# Altium PCB rys_PCB.PcbDoc
Units mm, origin at the board's own origin, x right, y up, seen from the top; angles counter-clockwise.
Board outline 56.3 x 64 mm, 2 copper layers (Top Layer, Bottom Layer); 70 components, 58 nets, 301 pads, 93 vias.
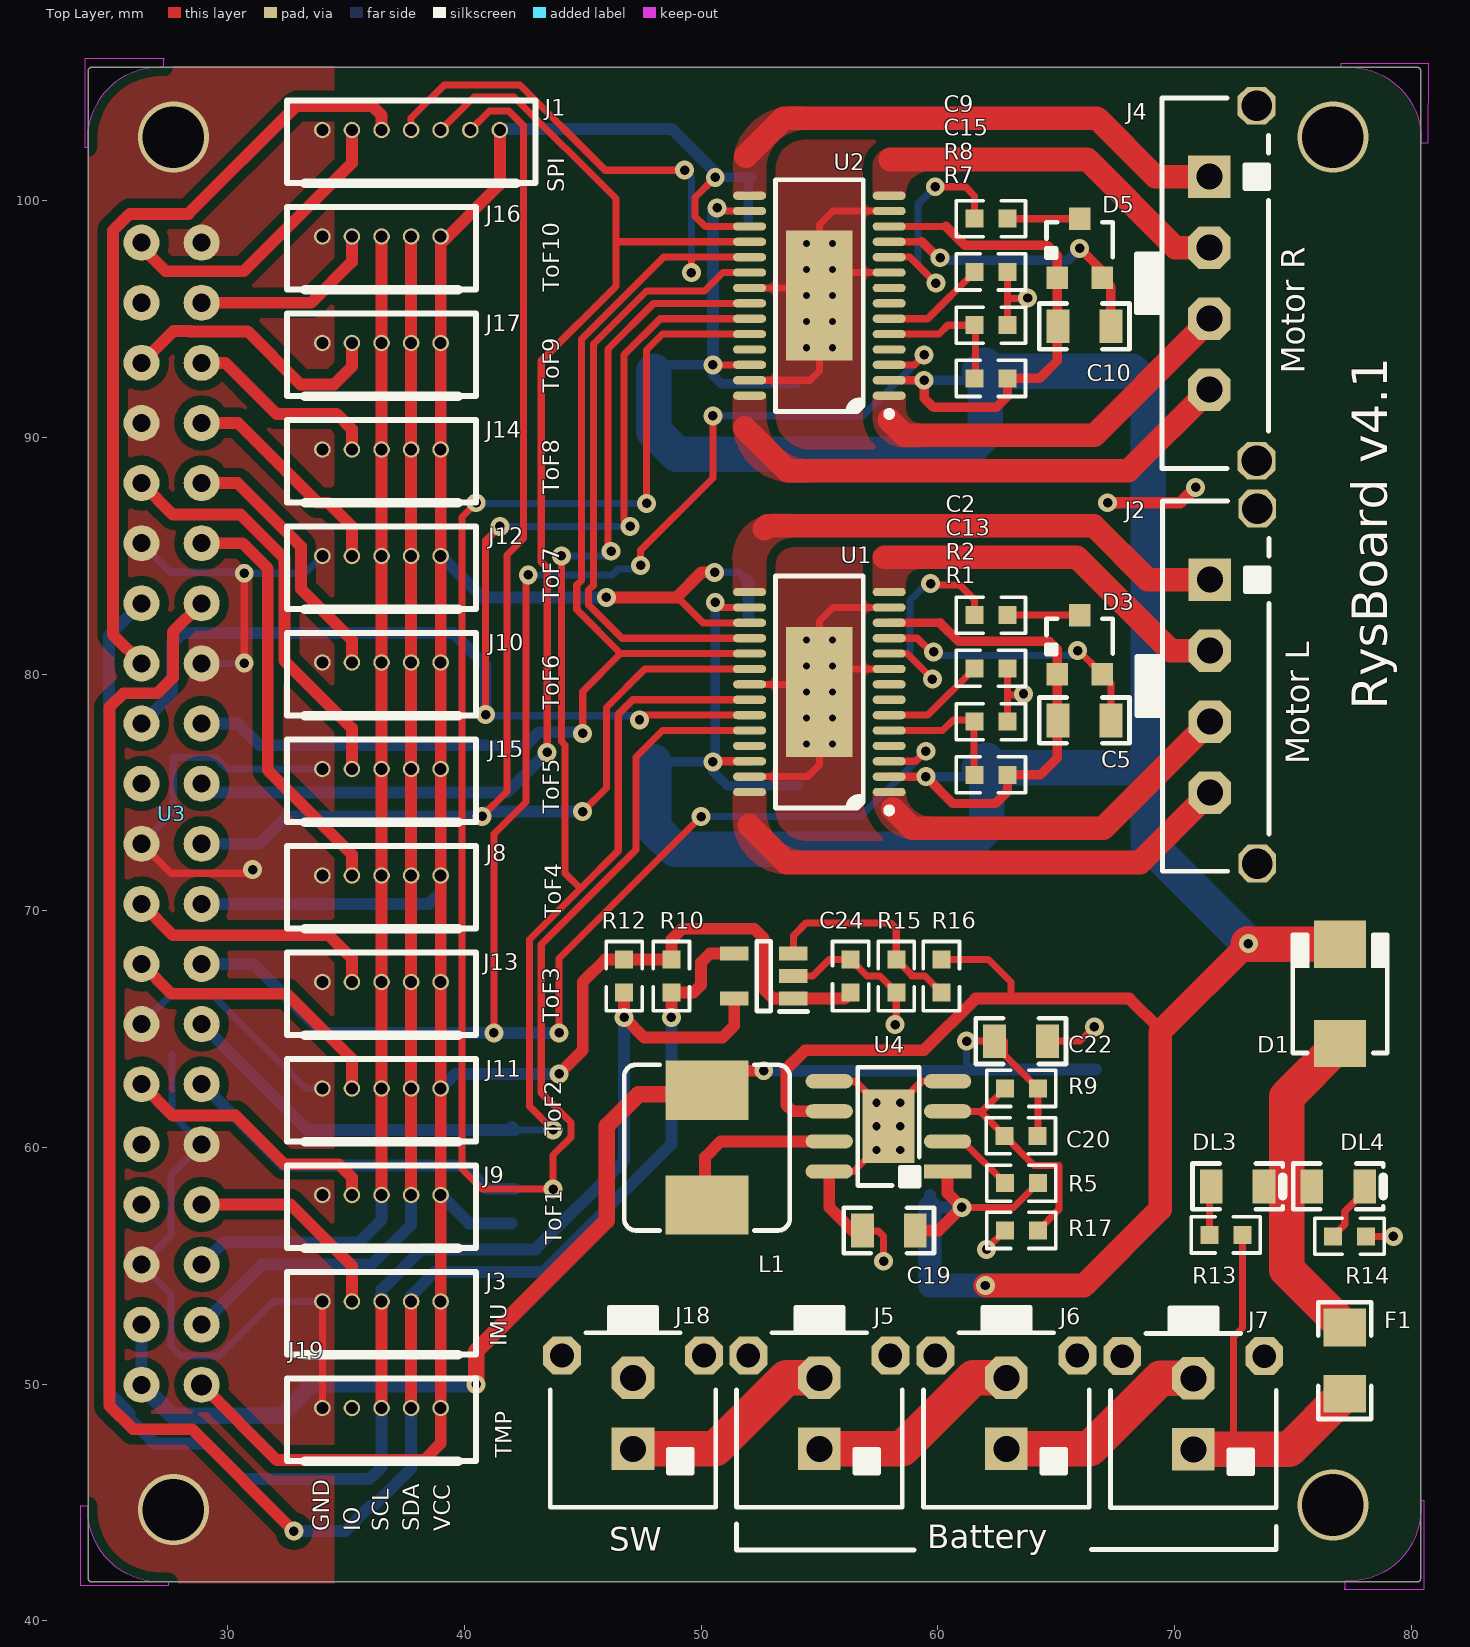
[diagram p0: Top Layer view]
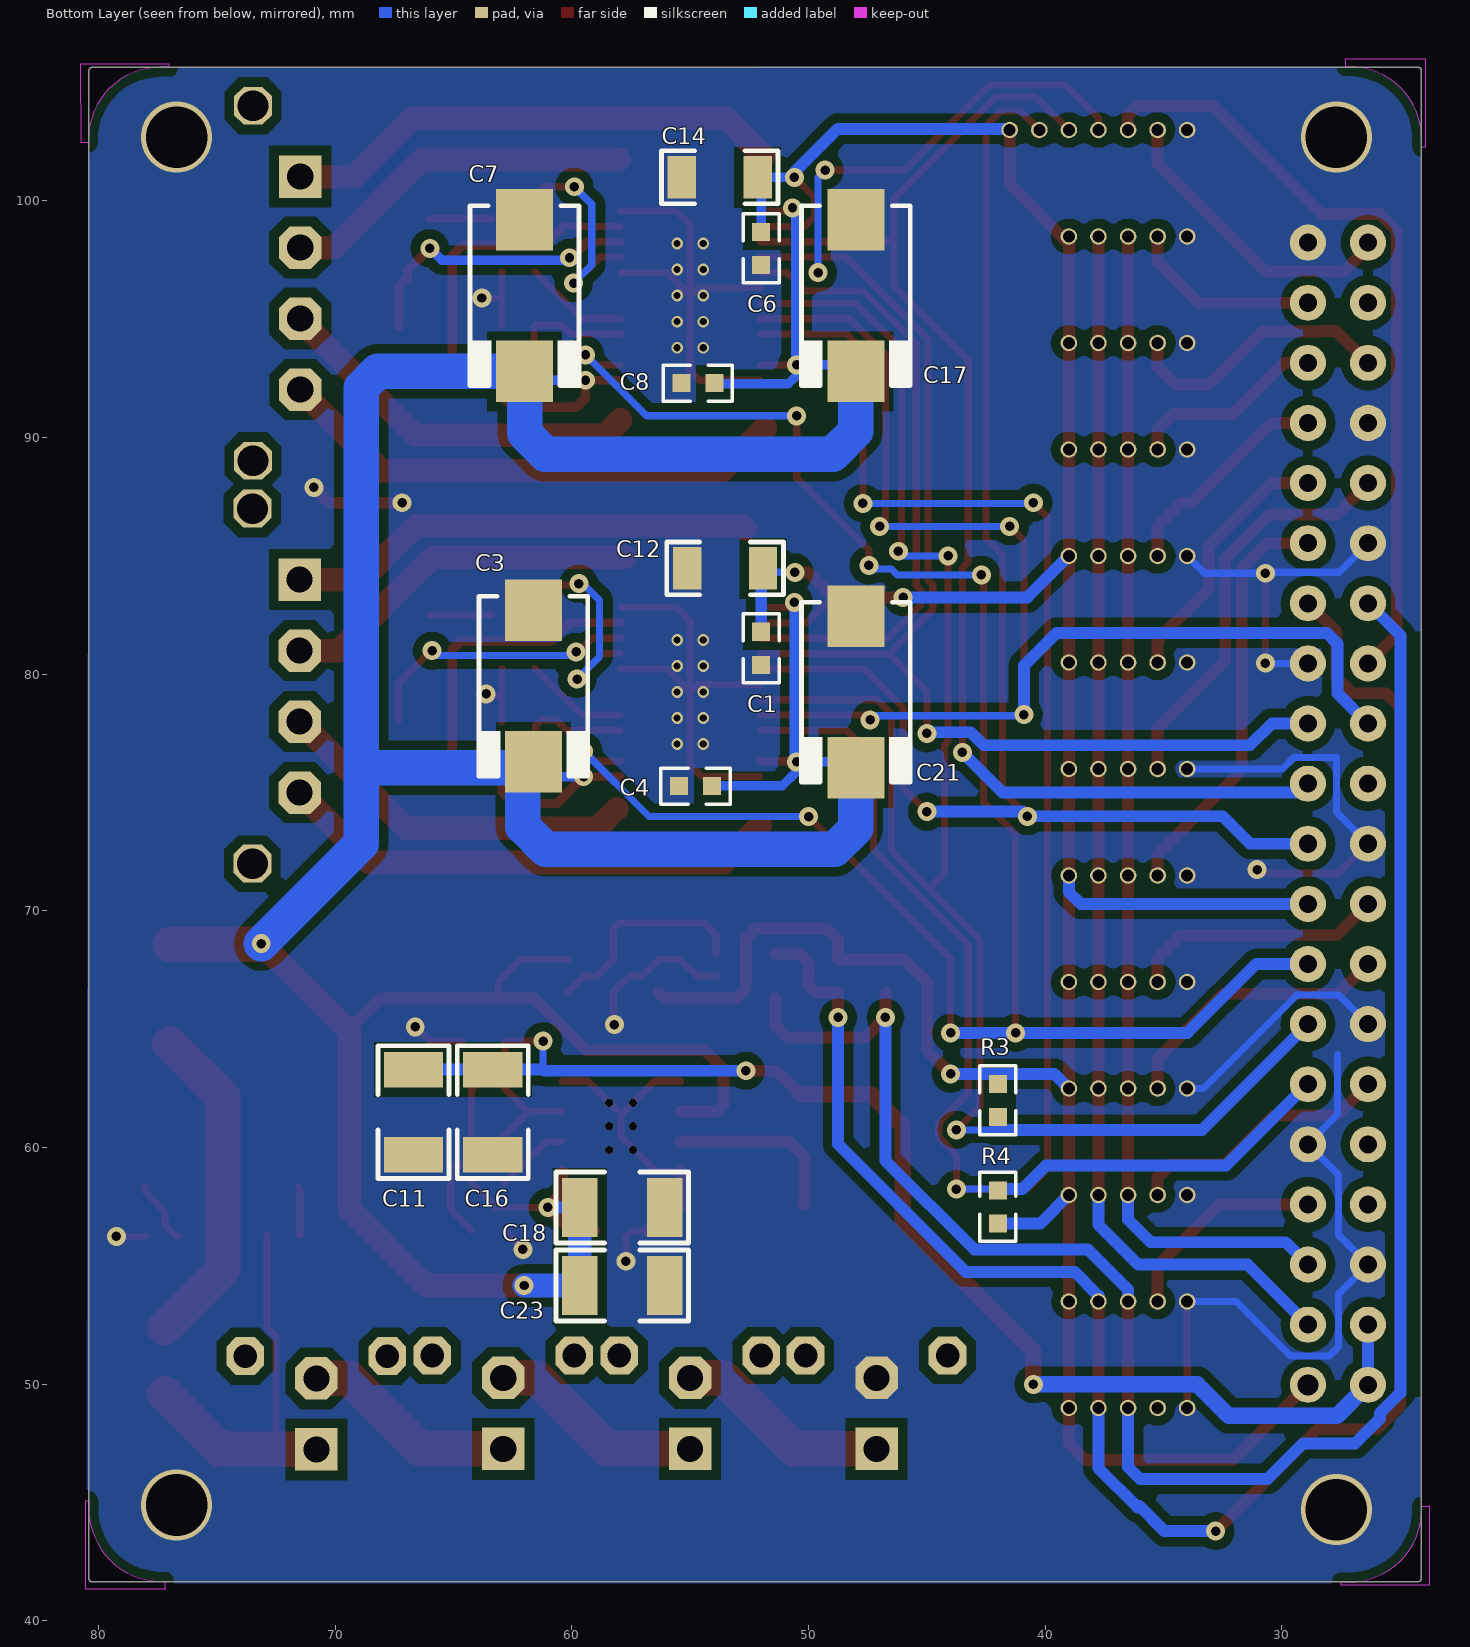
[diagram p1: Bottom Layer view, seen from below]

## Layer stack, top to bottom
Top Solder: solder mask 0.0102, Solder Resist, Dk 3.5
Top Layer: signal copper 0.0356
Dielectric 1: dielectric 0.32, FR-4, Dk 4.8
Bottom Layer: signal copper 0.0356
Bottom Solder: solder mask 0.0102, Solder Resist, Dk 3.5

## Board outline
24.257,41.65 cw(c24.257,41.8) 24.107,41.8 24.107,105.5 cw(c24.257,105.5) 24.257,105.65 80.257,105.65 cw(c80.257,105.5) 80.407,105.5 80.407,41.8 cw(c80.257,41.8) 80.228,41.652 80.229,41.652 cw(c80.2,41.8) 80.2,41.65
cut-out: 77.2,41.675 77.2,41.375 cw(c77.175,41.375) 77.175,41.35 80.55,41.35 80.55,45.075 80.4,45.075 80.4,44.7 cw(c77.375,44.7) 77.375,41.675
cut-out: 24.1,44.85 23.8,44.85 cw(c23.8,44.875) 23.775,44.875 23.775,41.5 27.5,41.5 27.5,41.65 27.125,41.65 cw(c27.125,44.675) 24.1,44.675
cut-out: 27.3,105.675 27.3,105.975 cw(c27.325,105.975) 27.325,106 23.95,106 23.95,102.275 24.1,102.275 24.1,102.65 cw(c27.125,102.65) 27.125,105.675
cut-out: 80.425,102.45 80.725,102.45 80.75,105.8 77.025,105.8 77.025,105.65 77.4,105.65 cw(c77.4,102.625) 80.425,102.625
cut-out: 80.4,105.65

## Design rules (kind name [scope] priority, off if disabled: settings)
Clearance [All] p1: gap=0.4 ignorepadtopadclearanceinfootprint=FALSE except(0.1: Arc-Text Track-Text SMDPad-Text THPad-Text Via-Text Fill-Text Poly-Text Region-Text Text-Text; 0.2: Arc-Arc Arc-Track Arc-SMDPad Arc-THPad Arc-Via Track-Track Track-SMDPad Track-THPad Track-Via SMDPad-SMDPad SMDPad-THPad SMDPad-Via THPad-THPad THPad-Via Via-Via)
ComponentClearance [All] p1: gap=0.2 collisioncheckmode=3 verticalgap=0.2 showdistances=FALSE
HoleSize [All] p1: absolutevalues=TRUE maxlimit=5 minlimit=0.025 maxpercent=80.000 minpercent=20.000
PlaneClearance [All] p1: clearance=0.8
PolygonConnect [All] p1: connectstyle=Direct reliefconductorwidth=0.254 reliefentries=4 polygonreliefangle="90 Angle" airgapwidth=0.254
RoutingCorners [All] p1: cornerstyle=45-Degree minsetback=2 maxsetback=2
RoutingVias [All] p1: holewidth=0.4 width=0.8 viastyle="Through Hole" minholewidth=0.4 minwidth=0.7 maxholewidth=1 maxwidth=5
SolderMaskExpansion [All] p1: expansion=0.5
Width [All] p1: maxlimit=2 minlimit=0.3 preferedwidth=0.5
26 further rules are at their usual default settings.

## Components (designator, comment, footprint, x,y, rotation, side; value= is the part's Value field where it differs from the comment)
C1 "100n" 0603 52,81.1 r90 bottom
C2 "10n" 0603 62.25,82.5 r180 top
C3 "47u" _C_TAN_D 61.625,79.5 r90 bottom
C4 "100n" 0603 54.775,75.275 r0 bottom
C5 "220n" 0805 66.2,78.051 r180 top
C6 "100n" 0603 52,98 r90 bottom
C7 "47u" _C_TAN_D 62,96 r90 bottom
C8 "100n" 0603 54.675,92.3 r0 bottom
C9 "10n" 0603 62.25,99.25 r180 top
C10 "220n" 0805 66.2,94.701 r180 top
C11 "10u" 1210_C 66.693,61.5 r90 bottom
C12 "10u" 1206_C 53.525,84.475 r180 bottom
C13 "100n" 0603 62.25,80.25 r0 top
C14 "10u" 1206_C 53.75,101 r180 bottom
C15 "100n" 0603 62.25,97 r0 top
C16 "10u" 1210_C 63.343,61.5 r90 bottom
C17 "47u" _C_TAN_D 48,96 r90 bottom
C18 "10u" 1210_C 57.868,57.475 r0 bottom
C19 "100n" 0805 57.936,56.5 r0 top
C20 "10n" 0603 63.518,60.5 r0 top
C21 "47u" _C_TAN_D 48,79.25 r90 bottom
C22 "100n" 0805 63.518,64.5 r180 top
C23 "10u" 1210_C 57.868,54.175 r0 bottom
C24 "100n" 0603 56.318,67.25 r270 top
D1 "SK52" SMB/DO-214AA 77,66.5 r270 top
D3 "BAV99" SOT-23 66,81.25 r0 top
D5 "BAV99" SOT-23 66,98 r0 top
DL3 "RED" 0805_LED 72.675,58.36 r180 top
DL4 "GREEN" 0805_LED 76.925,58.36 r180 top
F1 "2.5A" 1206_R 77.2,51 r270 top
IC1 "MCP3221A5T-E_OT" SOT95P280X145-5N 52.65,67.25 r180 top
J1 "PICO_BLADE_7" PicoBlade_THT_1x7_HEADER 36.5,103 r0 top
J2 "Molex Microfit" "MICROFIT 4x1 Vertical" 74,80 r90 top
J3 "PICO_BLADE_5" PicoBlade_THT_1x5_HEADER 36.5,53.5 r0 top
J4 "Molex Microfit" "MICROFIT 4x1 Vertical" 73.976,97.025 r90 top
J5 "Molex Microfit" "MICROFIT 1x2 Vertical" 55,50.275 r0 top
J6 "Molex Microfit" "MICROFIT 1x2 Vertical" 62.9,50.275 r0 top
J7 "Molex Microfit" "MICROFIT 1x2 Vertical" 70.8,50.25 r0 top
J8 "PICO_BLADE_5" PicoBlade_THT_1x5_HEADER 36.5,71.5 r0 top
J9 "PICO_BLADE_5" PicoBlade_THT_1x5_HEADER 36.5,58 r0 top
J10 "PICO_BLADE_5" PicoBlade_THT_1x5_HEADER 36.5,80.5 r0 top
J11 "PICO_BLADE_5" PicoBlade_THT_1x5_HEADER 36.5,62.5 r0 top
J12 "PICO_BLADE_5" PicoBlade_THT_1x5_HEADER 36.5,85 r0 top
J13 "PICO_BLADE_5" PicoBlade_THT_1x5_HEADER 36.5,67 r0 top
J14 "PICO_BLADE_5" PicoBlade_THT_1x5_HEADER 36.5,89.5 r0 top
J15 "PICO_BLADE_5" PicoBlade_THT_1x5_HEADER 36.5,76 r0 top
J16 "PICO_BLADE_5" PicoBlade_THT_1x5_HEADER 36.5,98.5 r0 top
J17 "PICO_BLADE_5" PicoBlade_THT_1x5_HEADER 36.5,94 r0 top
J18 "Molex Microfit" "MICROFIT 1x2 Vertical" 47.125,50.275 r0 top
J19 "PICO_BLADE_5" PicoBlade_THT_1x5_HEADER 36.5,49 r0 top
L1 "3.3uH" L_HPI0624 50.25,60 r0 top
R1 "27k1%" 0603_R 62.25,75.75 r0 top
R2 "10k1%" 0603_R 62.25,78 r180 top
R3 "10k" 0603_R 42,62 r90 bottom
R4 "10k" 0603_R 42,57.5 r270 bottom
R5 "1k" 0603_R 63.536,58.5 r0 top
R7 "27k1%" 0603_R 62.25,92.5 r0 top
R8 "10k1%" 0603_R 62.25,94.75 r180 top
R9 "11k1%" 0603_R 63.536,62.5 r0 top
R10 "4k7" 0603_R 48.75,67.25 r90 top
R12 "4k7" 0603_R 46.75,67.25 r90 top
R13 "10k" 0603_R 72.175,56.31 r0 top
R14 "10k" 0603_R 77.4,56.25 r180 top
R15 "10k1%" 0603_R 58.25,67.25 r90 top
R16 "27k1%" 0603_R 60.16,67.25 r90 top
R17 "2k1%" 0603_R 63.536,56.5 r0 top
U1 "ST L6470 28Pin" "ST HTSSOP-28" 55,79.25 r180 top locked
U2 "ST L6470 28Pin" "ST HTSSOP-28" 55,96 r180 top locked
U3 "RaspberryPi_3B+" RASPBERRYPI_S 26.36,98.24 r270 top locked
U4 "ST1S10PHR" HSOP8 57.918,60.9 r180 top

## Footprints (in the part's own frame and the unit in brackets; to place one, negate y for a bottom-side part, rotate by r counter-clockwise, add the part's x,y. Pads: shape width x height; smd on the part's side, far side on the other; paste and mask are expansions set on the pad)
0603 [mil]
  rect 30x30 smd: 1(-27.5,0) 2(27.5,0)
  silkscreen extent -58,-30 58,30, body extent -31,-16 31,16, height 31
0603_R [mil]
  rect 30x30 smd: 1(-27.5,0) 2(27.5,0)
  silkscreen extent -58,-30 58,30, body extent -31,-16 31,16, height 31
0805 [mil]
  rect 38x56 smd: 1(-44,0) 2(44,0)
  silkscreen extent -75,-38 75,38, body extent -39,-25 39,25, height 39
0805_LED [mm]
  rect 0.965x1.422 smd: A(1.118,0) K(-1.118,0)
  silkscreen extent -1.91,-0.97 1.91,0.97, body extent -1,-0.63 1,0.63, height 0.9
1206_C [mm]
  rect 1.2x1.8 smd: 1(-1.6,0) 2(1.6,0)
  silkscreen extent -2.46,-1.12 2.46,1.12, body extent -1.6,-0.8 1.6,0.8, height 0.8
1206_R [mm]
  rect 1.6x1.8 smd: 1(-1.4,0) 2(1.4,0)
  silkscreen extent -2.46,-1.12 2.46,1.12, body extent -1.6,-0.8 1.6,0.8, height 0.8
1210_C [mm]
  rect 1.5x2.5 smd: 1(-1.8,0) 2(1.8,0)
  silkscreen extent -2.8,-1.5 2.8,1.5, body extent -2.1,-1.25 2.1,1.25, height 2
_C_TAN_D [mm] "Capacitor, SM Tantalum; Body 7.3 x 4.3 mm (LxW typ)"
  rect 2.6x2.4 smd: N(3.2,0) P(-3.2,0)
  silkscreen extent -3.8,-2.3 3.8,2.3, body extent -3.65,-2.15 3.65,2.15, height 2.8
HSOP8 [mm] "H pad 8-Pin Small Outline Integrated Circuit 1.27 mm Pitch, IPC Medium Density"
  rect 2x0.6 smd: 1(-2.5,1.905)
  oval 2x0.6 smd: 2(-2.5,0.635) 3(-2.5,-0.635) 4(-2.5,-1.905) 5(2.5,-1.905) 6(2.5,-0.635) 7(2.5,0.635) 8(2.5,1.905)
  rect 2.2x3.1 smd: 9(0,0)
  silkscreen extent -1.3,-2.5 1.3,2.53, body extent -3.1,-2.5 3.1,2.5, height 1.75
L_HPI0624 [mm] "7.3mm x 7.3mm x 3.2mm"
  rect 3.5x2.5 smd: 1(0,2.425) 2(0,-2.425)
  silkscreen extent -3.5,-3.5 3.5,3.5, body extent -3.65,-3.65 3.65,3.65, height 3.2
"MICROFIT 1x2 Vertical" [mm] "Molex Vertical 3.00mm pitch Micro-Fit 3.0 Wire-to-Board Header 430450212"
  rect 1.8x1.8 hole 1.1: 1(0,-3)
  oct 1.8x1.8 hole 1.1: 2(0,0)
  oct 1.6x1.6 hole 1: MH(-3,0.94) MH(3,0.94)
  silkscreen extent -3.5,-5.47 3.5,2.98, body extent -3.57,-5.47 3.58,3.3, height 9.95
"MICROFIT 4x1 Vertical" [mm] "Molex Vertical 3.00mm pitch Micro-Fit 3.0 Wire-to-Board Header 436500429"
  rect 1.8x1.8 hole 1.1: 1(4,2.5)
  oct 1.8x1.8 hole 1.1: 2(1,2.5) 3(-2,2.5) 4(-5,2.5)
  oct 1.6x1.6 hole 1.3: MH(-8,0.5) MH(7,0.5)
  silkscreen extent -8.32,0 7.32,5.58, body extent -8.32,0.1 7.32,5.7, height 9.95
PicoBlade_THT_1x5_HEADER [mm]
  round 0.7 hole 0.51: 0(-2.5,0) 1(-1.25,0) 2(0,0) 3(1.25,0) 4(2.5,0)
  silkscreen extent -4,-2.25 4,1.25, body extent -4,-2.25 4,1.25, height 4.25
PicoBlade_THT_1x7_HEADER [mm]
  round 0.7 hole 0.51: 0(-2.5,0) 1(-1.25,0) 2(0,0) 3(1.25,0) 4(2.5,0) 5(3.75,0) 6(5,0)
  silkscreen extent -4,-2.25 6.5,1.25, body extent -3.95,-2.2 6.55,1.3, height 4.2
RASPBERRYPI_S [mil] "singleboard_computer_40PIN_header"
  round 60 hole 35: 1(1900,100)
  round 60 hole 30: 2(1900,0) 3(1800,100) 4(1800,0) 5(1700,100) 6(1700,0) 7(1600,100) 8(1600,0) 9(1500,100) 10(1500,0) 11(1400,100) 12(1400,0) 13(1300,100) 14(1300,0) 15(1200,100) 16(1200,0) 17(1100,100) 18(1100,0) 19(1000,100) 20(1000,0) 21(900,100) 22(900,0) 23(800,100) 24(800,0) 25(700,100) 26(700,0) 27(600,100) 28(600,0) 29(500,100) 30(500,0) 31(400,100) 32(400,0) 33(300,100) 34(300,0) 35(200,100) 36(200,0) 37(100,100) 38(100,0) 39(0,100) 40(0,0)
  body extent -1266,-71 2168,2322, height 93
SMB/DO-214AA [mm] "4.7x3.7mm max"
  rect 2x2.2 smd: A(2.1,0) K(-2.1,0)
  silkscreen extent -2.5,-2 2.5,2, body extent -2.83,-1.97 2.76,1.97, height 2.44
SOT95P280X145-5N [mm]
  rect 1.2x0.6 smd: 1(-1.25,0.95) 2(-1.25,0) 3(-1.25,-0.95) 4(1.25,-0.95) 5(1.25,0.95)
  silkscreen extent -1.85,-1.48 0.3,1.5, body extent -1.4,-1.48 1.4,1.48, height 1.45
SOT-23 [mm] "SOT-23; 3 Leads; Body 3.0 x 2.6 mm, inc. leads (LxW max)"
  rect 0.9x0.95 smd: 1(-0.95,-1.25) 2(0.95,-1.25) 3(0,1.25)
  silkscreen extent -1.4,-0.4 1.4,1.1, body extent -1.45,-1.25 1.45,1.25, height 1
"ST HTSSOP-28" [mm] "HTSSOP, 28-Leads, Body 9.70x4.40mm, Pitch 0.65mm, Thermal Pad 5.50x2.80mm, IPC Medium Density"
  oval 1.4x0.35 smd: 1(-2.95,4.225) 2(-2.95,3.575) 3(-2.95,2.925) 4(-2.95,2.275) 5(-2.95,1.625) 6(-2.95,0.975) 7(-2.95,0.325) 8(-2.95,-0.325) 9(-2.95,-0.975) 10(-2.95,-1.625) 11(-2.95,-2.275) 12(-2.95,-2.925) 13(-2.95,-3.575) 14(-2.95,-4.225) 15(2.95,-4.225) 16(2.95,-3.575) 17(2.95,-2.925) 18(2.95,-2.275) 19(2.95,-1.625) 20(2.95,-0.975) 21(2.95,-0.325) 22(2.95,0.325) 23(2.95,0.975) 24(2.95,1.625) 25(2.95,2.275) 26(2.95,2.925) 27(2.95,3.575) 28(2.95,4.225)
  rect 2.8x5.5 smd: 29(0,0)
  silkscreen extent -3.08,-4.9 1.85,5.12, body extent -2.25,-4.9 2.25,4.9, height 1.2

## Part data
C1 C2 C4 C5 C6 C8 C9 C10 C11 C12 C13 C14 C15 C16 C18 C19 C20 C22 C23 C24: library part C_CER, "Ceramic Capacitor"
C3 C7 C17 C21: library part C_TAN, "Tantalum Capacitor"
D1: library part SK26, "Schottky Diode 2A 60V", Supplier=TME, Symbol=SK52, URL=https://www.tme.eu/pl/details/sk52-dio/diody-schottky-smd/diotec-semiconductor/sk52/
D3 D5: "Charge pump diode", ComponentLink1Description=Supplier, ComponentLink1URL=https://www.tme.eu/pl/details/bav99-dio/diody-uniwersalne-smd/diotec-semiconductor/bav99/?gclid=CjwKCAjwuO3cBRAyEiwAzOxKsjEfIjBEMiuf1MfOOw41XfFBLf9W3FTm4SrcCEQFmDl5D7iYJBHTpRoCdegQAvD_BwE
DL3 DL4: library part LED1, "Light Emitting Diode"
F1: library part F, "Fuse", URL=https://www.tme.eu/pl/details/bsmd1206-ss2.5/bezpieczniki-smd-1206-superszybkie/eska/fuse-1206-ff-pw-2a5/
IC1: "Integrated Circuit", Manufacturer_Name=Microchip, Manufacturer_Part_Number=MCP3221A5T-E/OT, Mouser Part Number=579-MCP3221A5T-E/OT, RS Part Number=1653428, Allied_Number=70046146, Allied Price/Stock=http://www.alliedelec.com/microchip-technology-inc-mcp3221a5t-e-ot/70046146/, Datasheet Link=http://ww1.microchip.com/downloads/en/DeviceDoc/21732D.pdf, Height=1.45mm, Mouser Price/Stock=https://www.mouser.com/Search/Refine.aspx?Keyword=579-MCP3221A5T-E%2FOT, RS Price/Stock=http://uk.rs-online.com/web/p/products/1653428, URL=https://www.tme.eu/pl/details/mcp3221a2t-e_ot/przetworniki-a-d-uklady-scalone/microchip-technology/mcp3221a2t-e-ot/
J1: "1x7 header", URL=https://www.tme.eu/pl/details/mx-53047-0510/zlacza-sygnalowe-raster-125mm/molex/530470510/
J2 J4: library part "Microfit 1x4", Supplier=TME, Symbol="Molex 436500429", URL=https://www.tme.eu/pl/details/mx-43650-0429/zlacza-sygnalowe-raster-300mm/molex/43650-0429/
J3 J8 J9 J10 J11 J12 J13 J14 J15 J16 J17 J19: "1x5 header", URL=https://www.tme.eu/pl/details/mx-53047-0510/zlacza-sygnalowe-raster-125mm/molex/530470510/
J5 J6 J7 J18: library part "Microfit 2x1", Supplier=TME, Symbol="Molex 430450212"
L1: library part L_IND_HPI0624-3R3, "Inductor", Supplier=TME, Symbol=HPI0624-3R3, URL=https://www.tme.eu/pl/details/hpi0624-3r3/dlawiki-smd-mocy/ferrocore/
R1 R2 R3 R4 R5 R7 R8 R9 R10 R12 R13 R14 R15 R16 R17: library part R, "Resistor"
U1 U2: "SPI stepper driver"
U4: "DC/DC converter 3A", Supplier=TME, URL=https://www.tme.eu/pl/details/st1s14phr/regulatory-napiecia-uklady-dcdc/st-microelectronics/

## Via types
v1: diameter 0.8, hole 0.4, Top Layer to Bottom Layer, tented both sides, 62 vias
v2: diameter 0.5, hole 0.3, Top Layer to Bottom Layer, 20 vias
v3: diameter 0.35, hole 0.35, Top Layer to Bottom Layer, 6 vias
v4: diameter 3, hole 2.6, Top Layer to Bottom Layer, 4 vias
v5: diameter 0.8, hole 0.4, Top Layer to Bottom Layer, tented top, 1 vias

## Nets (pads, with @x,y where several pads share a name; then routed paths per layer and width w, separated by ;. In a path a pad name is that pad's centre, name@x,y a point inside that pad or via, vN(x,y) a via of type N, cw(c..) or ccw(c..) an arc to the next point about the centre after c; other vN are vias at no path point)
3V3: C1.2 C6.2 C12.2 C14.2 C24.2 IC1.1 J1.6 J3.4 J8.4 J9.4 J10.4 J11.4 J12.4 J13.4 J14.4 J15.4 J16.4 J17.4 J19.4 R3.2 R4.2 R10.2 R12.2 U1.17 U2.17 U3.1 U3.17 | length 145.2
  Top Layer w0.3: 48.987,83.278 49.014,83.25 50.089,82.175 U1.17 ; v1(50.6,101) 49.75,100.15 49.75,99.35 50.175,98.925 U2.17
  Top Layer w0.5: U3.1 32.08,46.8 38.3,46.8 39,47.5 J19.4 J3.4 J9.4 J11.4 J13.4 J8.4 J15.4 J10.4 J12.4 J14.4 J17.4 39,98.2 41.5,100.7 J1.6 ; v1(44,63.118) 45,64.118 45,67 45.949,67.949 R12.2 R10.2 48.75,68.793 49.207,69.25 52.25,69.25 52.65,68.85 52.65,66.7 53.05,66.3 IC1.1 56.066,66.3 C24.2 ; v1(46,83.25) 49.014,83.25 ; 48.987,83.278 50.019,84.311 v1(50.575,84.311)
  Bottom Layer w0.3: v1(50.575,84.311) 51.614,84.311 C12.2@51.9,84.025
  Bottom Layer w0.4: v1(50.6,101) C14.2@51.9,101 ; 52,99.118 52,100.9 C14.2@51.9,101 ; C14.2 C14.2@51.9,101
  Bottom Layer w0.5: U3.17 38.5,70.3 39,70.8 J8.4 ; J9.4 40.199,56.801 R4.2 ; J11.4 39.618,63.118 v1(44,63.118) ; J12.4 40.75,83.25 v1(46,83.25) ; J1.6@41.5,103.044 48.76,103.044 50.6,101.204 v1(50.6,101) ; C12.2@51.9,84.025 52,83.925 52,82.218
5V: C11.2 C16.2 C20.2 C22.2 L1.1 R9.2 U3.2 U3.4 | length 60
  Top Layer w0.3: v1(61.218,64.5) C22.2 62.819,64.5 62.819,63.915 R9.2 64.234,60.518 C20.2
  Top Layer w0.5: L1.1@50.368,62.25 51.368,63.25 v1(52.65,63.25)
  Top Layer w0.7: v1(40.5,50) 40.5,51.4 46.018,56.918 46.018,60.918 47.35,62.25 L1.1@50.368,62.25
  Bottom Layer w0.3: 61.218,63.3 v1(61.218,64.5)
  Bottom Layer w0.5: U3.2 U3.4 ; v1(52.65,63.25) 61.168,63.25 61.218,63.3 C16.2 C11.2
  Bottom Layer w0.7: U3.2 27.672,48.668 32.247,48.668 33.584,50.005 40.495,50.005 v1(40.5,50)
BUSY: R3.1 U1.22 U2.22 U3.13 | length 74.2
  Top Layer w0.3: v1(43.75,60.75) 42.75,61.75 42.75,68.793 44.9,70.943 ; v1(44.1,85) 44.1,77.161 44.25,77.011 44.25,76.389 44.25,71.593 44.9,70.943 ; v1(46.2,85.2) 46.075,85.325 46.075,93.75 48,95.675 U2.22 ; U1.22 47.114,78.925 46.5,78.311 46.5,72.543 44.9,70.943
  Bottom Layer w0.3: 42.132,60.75 v1(43.75,60.75) ; v1(44.1,85) 46,85 v1(46.2,85.2)
  Bottom Layer w0.5: U3.13 33.37,60.75 42.132,60.75 42,60.882
CE0: U1.23 U2.23 U3.24 | length 58.5
  Top Layer w0.3: v1(40.9,78.3) 40.9,85.65 v1(41.5,86.25) ; v1(47,86.25) 46.75,86.5 46.75,93.5 48.275,95.025 U2.23 ; v1(47.4,78.075) 47.6,78.275 U1.23
  Bottom Layer w0.3: v1(40.9,78.3) v1@40.9,78.25 ; v1(41.5,86.25) v1(47,86.25) ; v1(47.4,78.075) 47.225,78.25 v1@40.9,78.25 ; v1@40.9,78.25 40.875,78.275 40.85,78.25 v1@40.9,78.25
  Bottom Layer w0.5: U3.24 26.37,77.92 27.65,79.2 27.65,81.3 28.1,81.75 39.518,81.75 40.9,80.368 v1(40.9,78.3)
CE1: J1.2 U3.26 | length 33.1
  Top Layer w0.5: U3.26 25.148,81.672 25.148,98.742 25.858,99.452 28.342,99.452 32.903,104.013 36.109,104.013 36.5,103.622 J1.2
FLAG: R4.1 U1.24 U2.24 U3.11 | length 93.8
  Top Layer w0.3: v1(40.5,87.25) 39.9,86.65 39.9,59.1 40.75,58.25 v1(43.75,58.25) 43.75,59.689 44.5,60.439 44.5,61.061 43.25,62.311 43.25,68.586 47.25,72.586 47.25,76.5 48.375,77.625 U1.24 ; v1(47.7,87.225) 47.525,87.225 47.7,87.4 47.7,93.7 48.375,94.375 U2.24
  Bottom Layer w0.3: v1(40.5,87.25) 40.525,87.225 v1(47.7,87.225) ; R4.1@42.132,58.25 v1(43.75,58.25)
  Bottom Layer w0.5: U3.11 28.92,62.68 32.35,59.25 39.963,59.25 40.963,58.25 R4.1@42.132,58.25
GND: C1.1 C3.N C4.2 C6.1 C7.N C8.2 C11.1 C12.1 C13.2 C14.1 C15.2 C16.1 C17.N C18.1 C19.1 C21.N C22.1 C23.1 C24.1 IC1.2 J1.0 J3.0 J8.0 J9.0 J10.0 J11.0 J12.0 J13.0 J14.0 J15.0 J16.0 J17.0 J18.2 J19.0 R2.1 R8.1 R14.1 R15.1 R17.1 U1.9 U1.13 U1.21 U1.27 U1.29 U2.9 U2.13 U2.21 U2.27 U2.29 U3.6 U3.9 U3.14 U3.20 U3.25 U3.30 U3.34 U3.39 U4.4 U4.5 U4.8 U4.9 | length 140.9
  Top Layer w0.3: U3.20 27.607,71.593 30.893,71.593 v1(31.05,71.75) ; v1(30.7,80.477) v1(30.7,84.27) ; J19.0 J3.0 ; U1.27 54.5,75.675 55,76.175 U1.29 ; U1.21 54.675,79.575 U1.29 ; U2.27 54.608,92.425 55,92.817 U2.29 ; U2.21 54.675,96.325 U2.29 ; IC1.2 54.719,67.25 55.418,67.948 C24.1 57.016,67.25 57.562,67.25 58.25,66.562 R15.1 58.25,65.2 58.249,65.199 v1(58.2,65.199) ; U4.8 56.445,58.995 57.918,60.468 U4.9 U4.9@57.918,61.4 ; U4.5 56.513,62.805 v3(57.418,61.9) U4.9@57.918,61.4 ; C19.1@56.837,56.481 57.487,56.481 57.718,56.25 v1(57.718,55.2) ; U1.9 55.975,80.225 U1.29 ; U1.13 55.575,82.825 55,82.25 U1.29 ; U2.9 55.975,96.975 U2.29 ; U2.13 55.575,99.575 55,99 U2.29 ; U4.4 59.323,62.805 v3(58.418,61.9) U4.9@57.918,61.4 ; v1(62.068,55.7) 62.068,55.731 R17.1 ; R2.1 62.948,79.075 ; C13.2 62.948,79.075 ; R8.1 62.948,95.875 ; C15.2 62.948,95.875 ; v1(63.625,79.175) 63.576,79.126 63,79.126 ccw(c63,79.075) 62.948,79.075 ; v1(63.8,95.9) 63.775,95.875 62.948,95.875 ; C22.1 66.018,64.5 v1(66.617,65.1) ; R14.1@78.043,56.25 R14.1 v1(79.25,56.25)
  Top Layer w0.5: U4.8 55.418,57.475 56.393,56.5 C19.1 C19.1@56.837,56.481 ; v1(67.175,87.25) 70.25,87.25 v1(70.9,87.9)
  Bottom Layer w0.3: U3.14 27.596,66.456 29.356,66.456 33.311,62.5 J11.0 ; U3.20 27.7,74.18 27.7,76.5 27.708,76.492 29.479,76.492 29.971,76 J15.0 ; U3.30 27.589,84.311 30.659,84.311 v1(30.7,84.27) 33.27,84.27 J12.0 ; 27.644,63.936 27.644,61.396 U3.9 27.6,58.84 27.6,56.3 U3.6 27.6,53.82 27.6,51.6 28,51.2 29.629,51.2 31.929,53.5 J3.0 ; U3.25 30.683,80.46 v1(30.7,80.477)
  other v2: 54.45,77.05 55.55,77.05 54.45,78.15 55.55,78.15 54.45,79.25 55.55,79.25 54.45,80.35 55.55,80.35 54.45,81.45 55.55,81.45 54.45,93.8 55.55,93.8 54.45,94.9 55.55,94.9 54.45,96 55.55,96 54.45,97.1 55.55,97.1 54.45,98.2 55.55,98.2
  other v3: 57.418,59.9 58.418,59.9 57.418,60.9 58.418,60.9
  other v4: 27.7,44.7 76.7,44.9 27.7,102.7 76.7,102.7
IRQ: J1.1 U3.40 | length 13.9
  Top Layer w0.5: J1.1 35.25,101.6 30.678,97.028 27.372,97.028 26.16,98.24 U3.40 U3.40@26.4,98.24 ; U3.40@26.4,98.24 26.4,98.132 26.7,98.132 26.592,98.24 U3.40@26.4,98.24
MISO: J1.4 U2.18 U3.21 | length 55.7
  Top Layer w0.3: J1.4 40.4,104.4 42.1,104.4 46.4,100.1 46.4,98.275 ; v1(43.5,76.7) 43.5,83.439 43.5,84.5 43.25,84.75 43.25,93.25 46.4,96.4 46.4,98.275 ; U2.18 46.4,98.275
  Bottom Layer w0.5: U3.21 29.28,75 41.8,75 v1(43.5,76.7)
MOSI: J1.5 U1.20 U3.19 | length 61
  Top Layer w0.3: J1.5 41.057,103.807 41.874,103.807 42.5,103.181 42.5,85.743 41.8,85.043 41.8,75.05 v1(40.75,74) ; v1(45,74.2) 46,75.2 46,78.6 47.625,80.225 U1.20
  Bottom Layer w0.5: U3.19 31.34,72.84 32.5,74 v1(40.75,74) 40.95,74.2 v1(45,74.2)
NetC2_1: C2.1 D3.3 | length 2.6
  Top Layer w0.3: 63.368,82.5 D3.3
NetC2_2: C2.2 U1.10 | length 10
  Top Layer w0.3: U1.10 58.7,80.875 v1(59.775,79.8) ; v1(59.703,83.829) 59.75,83.782 60.918,83.782 61.55,83.15 C2.2@61.55,82.5
  Bottom Layer w0.3: v1(59.703,83.829) 59.571,83.829 59.55,83.85 58.825,83.125 58.825,80.75 v1(59.775,79.8)
NetC9_1: C9.1 D5.3 | length 2.6
  Top Layer w0.3: 63.368,99.25 D5.3
NetC9_2: C9.2 U2.10 | length 9.9
  Top Layer w0.3: U2.10 58.825,97.625 v1(59.925,96.525) ; v1(59.897,100.6) 61.168,100.6 61.551,100.217 C9.2
  Bottom Layer w0.3: v1(59.897,100.6) 59.16,99.863 59.16,97.298 59.925,96.533 v1(59.925,96.525)
NetC13_1: C13.1 U1.6 | length 4.4
  Top Layer w0.3: U1.6 59.577,78.275 C13.1
NetC15_1: C15.1 U2.6 | length 4.4
  Top Layer w0.3: U2.6 59.577,95.025 C15.1
NetC20_1: C20.1 R9.1 R17.2 U4.3 | length 10.2
  Top Layer w0.3: U4.3 61.784,61.535 ; R9.1 61.872,61.535 61.784,61.535 ; R17.2 65.118,57.384 65.118,59.25 64.069,59.25 C20.1 61.784,61.535
NetD1_A: D1.A DL3.K DL4.A F1.1 | length 13.9
  Top Layer w1.5: D1.A 74.75,62.15 74.75,54.85 F1.1
NetDL3_A: DL3.A R13.1 | length 2.1
  Top Layer w0.3: R13.1 71.476,58.279 DL3.A
NetDL4_K: DL4.K R14.2 | length 2.7
  Top Layer w0.3: R14.2@76.646,56.25 R14.2 77.2,56.75 77.2,57.3 78.043,58.143 DL4.K
NetF1_2: F1.2 J7.1 R13.2 | length 16.6
  Top Layer w0.3: 72.5,47.25 72.5,52 72.873,52.373 R13.2
  Top Layer w1.5: J7.1 72.5,47.25 74.85,47.25 F1.2
NetIC1_3: IC1.3 R15.2 R16.1 | length 9.3
  Top Layer w0.3: IC1.3 53.9,68.956 54.444,69.5 58,69.5 58.25,69.25 R15.2 58.9,67.298 58.9,67.25 59.461,67.25 R16.1
NetJ2_1: J2.1 U1.15 | length 19.8
  Top Layer w1: 52.675,86.15 52.8,86.275 66.594,86.275 68.869,84 J2.1
NetJ2_2: J2.2 U1.14 | length 15.4
  Top Layer w1: 57.75,84.952 65.877,84.952 69.829,81 J2.2
NetJ2_3: J2.3 U1.1 | length 15.6
  Top Layer w1: 58.104,74.322 58.925,73.5 67,73.5 J2.3
NetJ2_4: J2.4 U1.28 | length 21.3
  Top Layer w1: 52.038,73.612 53.6,72.05 68.55,72.05 J2.4
NetJ4_1: J4.1 U2.15 | length 21.3
  Top Layer w1: 51.9,101.9 53.5,103.5 66.725,103.5 69.2,101.025 J4.1
NetJ4_2: J4.2 U2.14 | length 15
  Top Layer w1: 58,101.75 66.325,101.75 70.05,98.025 J4.2
NetJ4_3: J4.3 U2.1 | length 15
  Top Layer w1: 57.95,90.75 58.6,90.1 66.617,90.1 J4.3@70.9,94.383
NetJ4_4: J4.4 U2.28 | length 21.8
  Top Layer w1: 51.84,90.41 53.65,88.6 68.051,88.6 J4.4
NetJ5_1: J5.1 J6.2 | length 9.1
  Top Layer w1.5: J5.1 58.503,47.275 61.503,50.275 J6.2
NetJ5_2: J5.2 J18.1 | length 9.1
  Top Layer w1.5: J18.1 50.603,47.275 53.603,50.275 J5.2
NetJ6_1: J6.1 J7.2 | length 9.1
  Top Layer w1.5: J6.1 66.428,47.275 69.403,50.25 J7.2
NetL1_2: L1.2 U4.7 | length 7.6
  Top Layer w0.5: L1.2 50.168,57.657 50.168,59.6 50.833,60.265 U4.7
NetR1_1: R1.1 R2.2 U1.5 | length 6
  Top Layer w0.3: U1.5 60.207,77.625 60.657,78.075 61.3,78.075 61.525,77.85 R1.1@61.525,75.75
NetR5_1: R5.1 U4.2 | length 3.2
  Top Layer w0.3: U4.2 61.072,60.265 R5.1
NetR7_1: R7.1 R8.2 U2.5 | length 6
  Top Layer w0.3: U2.5 60.05,94.375 60.425,94.75 R8.2 61.6,94.701 R7.1@61.6,92.5
OD\: J3.1 U3.7 | length 8.9
  Top Layer w0.5: U3.7 32.65,57.6 35.25,55 J3.1
SCL: J8.2 J9.2 J10.2 J11.2 J12.2 J13.2 J14.2 J15.2 J16.2 J17.2 U3.5 | length 49.9
  Top Layer w0.5: J9.2 J11.2 J13.2 J8.2 J15.2 J10.2 J12.2 J14.2 J17.2 J16.2
  Bottom Layer w0.5: U3.5 29.84,56 35.55,56 36.5,56.95 J9.2
SCL1: IC1.5 J3.2 J19.2 R12.1 U3.28 | length 80.8
  Top Layer w0.5: J19.2 J3.2 ; R12.1 v1(46.75,65.5) 47.6,64.65 50.9,64.65 51.4,65.15 IC1.5
  Bottom Layer w0.5: U3.28 26.35,83 24.991,81.641 24.991,49.635 25.858,48.768 25.858,48.542 26.9,47.5 29.1,47.5 30.6,46 36,46 36.5,46.5 J19.2 ; J3.2 36.5,54 38.2,55.7 43,55.7 46.75,59.45 v1(46.75,65.5)
SCLK: J1.3 U1.19 U2.19 U3.23 | length 67.8
  Top Layer w0.3: J1.3 37.75,103.5 39.15,104.9 42.35,104.9 45.95,101.3 v1@48.965,101.3 ; v1(45,77.5) 45,79.275 46.6,80.875 ; v1(49.593,96.975) 49.593,97.618 49.6,97.625 ; U1.19 46.6,80.875 ; U2.19 49.6,97.625 ; 46.6,80.875 46.6,80.882 44.75,82.732 44.75,83.768 44.95,83.968 44.95,94.157 48.418,97.625 49.6,97.625
  Bottom Layer w0.3: v1(49.302,101.3) 49.593,101.01 v1(49.593,96.975)
  Bottom Layer w0.5: U3.23 30.43,77.92 31.35,77 42.598,77 43.148,77.55 44.95,77.55 v1(45,77.5)
SDA: J8.3 J9.3 J10.3 J11.3 J12.3 J13.3 J14.3 J15.3 J16.3 J17.3 U3.3 | length 52.4
  Top Layer w0.5: J9.3 J11.3 J13.3 J8.3 J15.3 J10.3 J12.3 J14.3 J17.3 J16.3
  Bottom Layer w0.5: U3.3 31.44,55.06 36.06,55.06 37.75,56.75 J9.3
SDA1: IC1.4 J3.3 J19.3 R10.1 U3.27 | length 83.7
  Top Layer w0.5: U3.27 27.688,81.788 27.688,79.863 27.025,79.2 25.6,79.2 25.001,78.601 25.001,49.099 26,48.1 28.5,48.1 v1(32.8,43.8) ; J19.3 J3.3 ; v1(48.75,65.5) R10.1 49.676,66.552 50,66.875 50,67.832 50.368,68.2 IC1.4
  Bottom Layer w0.5: v1(32.8,43.8) 34.96,43.8 36.03,44.87 36.1,44.8 37.75,46.45 J19.3 ; J3.3 37.75,53.75 38.75,54.75 43.36,54.75 48.75,60.14 v1(48.75,65.5)
SDI: U1.18 U2.20 | length 26.3
  Top Layer w0.3: U1.18 46.664,81.525 45.25,82.939 45.25,83.56 45.45,83.76 45.45,93.95 47.7,96.2 50.152,96.2 50.927,96.975 U2.20
STBY: U1.3 U2.3 U3.15 | length 84.1
  Top Layer w0.3: v1(41.25,64.848) 41.25,73.257 42.6,74.607 v1@42.6,83.925 ; v1(44,64.848) 44,67.991 v1(50,73.991) ; v1(47.45,84.6) 47.45,85.25 50.5,88.3 v1(50.5,90.923) ; U1.3 59.057,76.325 59.482,76.75 v5(59.5,76.75) ; U2.3 59.014,93.075 59.425,93.486 v1(59.425,93.5)
  Bottom Layer w0.3: v1(42.7,84.2) 46.249,84.2 46.499,84.45 47.3,84.45 v1(47.45,84.6) ; v1(50,73.991) 56.741,73.991 v5(59.5,76.75) ; v1(50.5,90.923) 56.848,90.923 v1(59.425,93.5)
  Bottom Layer w0.5: U3.15 31.082,67.76 33.994,64.848 v1(41.25,64.848) v1(44,64.848)
TOF0: J8.1 U3.29 | length 17.7
  Top Layer w0.5: U3.29 30.632,85.54 31.695,84.477 31.695,75.955 35.25,72.4 J8.1
TOF1: J10.1 U3.31 | length 11.1
  Top Layer w0.5: U3.31 30.42,88.08 33.095,85.405 33.095,83.605 35.25,81.45 J10.1
TOF2: J12.1 U3.33 | length 9.4
  Top Layer w0.5: U3.33 30.43,90.62 33.8,87.25 34.25,87.25 35.25,86.25 J12.1
TOF3: J14.1 U3.35 | length 8.4
  Top Layer w0.5: U3.35 29.89,93.16 32.05,91 34.6,91 35.25,90.35 J14.1
TOF4: J16.1 U3.37 | length 8.1
  Top Layer w0.5: U3.37 33.525,95.7 35.25,97.425 J16.1
TOF5: J9.1 U3.12 | length 11.3
  Top Layer w0.5: U3.12 27.688,61.352 30.337,61.352 32.389,59.3 34.7,59.3 35.25,58.75 J9.1
TOF6: J11.1 U3.16 | length 11.8
  Top Layer w0.5: U3.16 27.62,66.5 32.5,66.5 35.25,63.75 J11.1
TOF7: J13.1 U3.18 | length 10.8
  Top Layer w0.5: U3.18 27.688,68.972 34.278,68.972 35.25,68 J13.1
TOF8: J15.1 U3.32 | length 17.4
  Top Layer w0.5: U3.32 27.688,86.752 30.548,86.752 32.395,84.905 32.395,80.582 35.25,77.727 J15.1
TOF9: J17.1 U3.36 | length 11.7
  Top Layer w0.5: U3.36 27.7,94.5 28.386,94.5 28.398,94.488 30.837,94.488 33.075,92.25 34.5,92.25 35.25,93 J17.1
VBOOT0: C5.1 D3.2 U1.11 | length 12.5
  Top Layer w0.3: U1.11 59.139,81.525 v1@59.714,80.95 ; v1(59.825,80.95) v1@59.714,80.95 ; v1@59.91,80.754 v1@59.714,80.95 ; v1(65.908,81) 65.95,81 D3.2 67.318,79.632 C5.1
  Bottom Layer w0.3: v1(59.825,80.95) 59.825,80.972 59.999,80.798 66.018,80.798 65.908,80.908 v1(65.908,81)
VBOOT1: C10.1 D5.2 U2.11 | length 12.4
  Top Layer w0.3: U2.11 59.335,98.275
  Top Layer w0.4: 59.335,98.275 60.01,97.6 v1(60.1,97.6) ; v1(66,98) 66.95,97.05 D5.2 67.318,96.382 C10.1
  Bottom Layer w0.4: v1(60.1,97.6) 60.2,97.5 65.5,97.5 v1(66,98)
VMOT: C3.P C4.1 C5.2 C7.P C8.1 C10.2 C17.P C18.2 C19.2 C21.P C23.2 D1.K D3.1 D5.1 R1.2 R5.2 R7.2 R16.2 U1.2 U1.12 U1.16 U1.26 U2.2 U2.12 U2.16 U2.26 U4.1 U4.6 | length 227.6
  Top Layer w0.3: v1(50.5,93.075) U2.26 ; v1(50.6,83.036) 50.81,82.825 U1.16 ; v1@50.775,99.575 U2.16 ; U2.12 60.35,98.925 ; R16.2 62.152,67.948 63.1,67 63.1,66.3 ; v1(61.018,57.475) 63.209,57.475 R5.2
  Top Layer w0.35: v1@50.525,76.325 U1.26 ; U1.2 v1(59.5,75.675) ; U1.12 60.1,82.175 ; U2.2 v1(59.425,92.425)
  Top Layer w0.4: v1(50.5,76.3) v1@50.525,76.325 ; v1@50.6,82.925 v1(50.6,83.036) ; v1@50.677,99.673 v1@50.775,99.575 ; v1(59.425,92.425) 59.425,91.675 59.825,91.275 62.475,91.275 62.948,91.749 R7.2 64.3,92.5 65.05,93.25 D5.1 65.05,97.7 64.611,98.139 61.136,98.139 60.35,98.925 ; v1(59.5,75.675) 60.633,74.542 62.442,74.542 62.948,75.048 R1.2 64.332,75.75 65.05,76.468 D3.1 65.05,81.05 64.711,81.389 60.886,81.389 60.1,82.175
  Top Layer w0.5: v1@50.677,99.673 v1(50.677,99.705) ; U4.6 53.865,61.535 53.6,61.8 53.6,63.323 54.394,64.118 59.418,64.118 61.6,66.3 63.1,66.3 68.1,66.3 69.403,64.997 69.403,64.903 ; C19.2 60.043,56.5 v1(61.018,57.475) 60.418,58.075 U4.1
  Top Layer w1: v1(62.018,54.175) 66.175,54.175 69.403,57.403 69.403,64.903 v1(73.125,68.625)
  Top Layer w1.5: v1(73.125,68.625) 73.15,68.6 D1.K
  Bottom Layer w0.4: C17.P@47.5,92.8 C17.P@47.75,92.8 ; C21.P@48,76.3 v1(50.5,76.3) ; C17.P 48.275,93.075 v1(50.5,93.075) 50.5,92.631 50.856,92.276 C8.1@54.026,92.276 ; v1(50.6,83.036) 50.6,76.4 v1(50.5,76.3) ; C4.1@54.113,75.288 51.112,75.288 50.5,75.9 v1(50.5,76.3) ; v1(59.425,92.425) 61.375,92.425 61.75,92.8 C7.P@62,93.05 ; v1(59.5,75.675) 61.377,75.675 61.75,76.048 C3.P@62.068,76.366
  Bottom Layer w0.5: v1(50.5,93.075) 50.5,99.527 v1(50.677,99.705) ; C18.2@59.668,58.002 C18.2 v1(61.018,57.475)
  Bottom Layer w1: C18.2 C23.2 v1(62.018,54.175)
  Bottom Layer w1.5: C21.P@48,76.3 C21.P 48,73.5 48.9,72.6 61.1,72.6 62.068,73.568 C3.P@62.068,76.048 ; C17.P 48,90.279 48.979,89.3 61.118,89.3 62,90.182 C7.P ; C3.P@61.75,76.048 C3.P@62.068,76.048 ; C7.P@61.75,92.8 C7.P ; C7.P@62,93.05 C7.P ; C3.P@62.068,76.366 C3.P@62.068,76.048 ; v1(73.125,68.625) 68.9,72.85 68.9,76.048 ; C7.P 68.2,92.8 68.9,92.1 68.9,76.048 ; C3.P@62.068,76.048 68.9,76.048
pads on no net: J2.MH J4.MH J5.MH J6.MH J7.MH J18.MH J19.1 U1.4 U1.7 U1.8 U1.25 U2.4 U2.7 U2.8 U2.25 U3.8 U3.10 U3.22 U3.38

## Polygon pours and split planes (outlines as drawn)
GND on Top Layer "GND_L01_P038" (solid, remove dead copper, pour order 38): 58.031,86.458 52.109,86.458 52.109,72.844 53.26,71.692 53.293,71.725 58.06,71.725
GND on Top Layer "GND_L01_P036" (solid, remove dead copper, pour order 36): 57.971,103.433 52.048,103.433 52.048,89.819 53.2,88.667 53.233,88.7 58,88.7
GND on Top Layer "GND_L01_P039" (solid, remove dead copper, pour order 39): 24.106,41.6 24.106,105.7 34.5,105.7 34.5,105.5 34.5,41.6
NetJ4_1 on Top Layer "NETJ4_1_L01_P032" (solid, remove dead copper, pour order 32): 52.75,100.225 52.75,101.35 cw(c54.4,101.35) 54.4,103 54.4,104 53.894,104 ccw(c53.894,101.46) 51.354,101.46 51.354,100.225 ccw(c51.525,100.225) 51.525,100.05 52.572,100.05 ccw(c52.572,100.225) 52.747,100.225
NetJ4_4 on Top Layer "NETJ4_4_L01_P028" (solid, remove dead copper, pour order 28): 52.75,91.775 52.75,90.95 ccw(c54.625,90.95) 54.625,89.075 54.625,88.1 53.89,88.1 cw(c53.89,90.64) 51.35,90.64 51.35,91.775 cw(c51.525,91.775) 51.525,91.95 52.575,91.95 cw(c52.575,91.775) 52.75,91.775
NetJ4_2 on Top Layer "NETJ4_2_L01_P026" (solid, remove dead copper, pour order 26): 58.65,100.275 cw(c59.625,100.275) 59.625,101.25 59.625,102.25 58.05,102.25 ccw(c58.05,101.45) 57.25,101.45 57.25,100.225 ccw(c57.425,100.225) 57.425,100.05 58.475,100.05 ccw(c58.475,100.225) 58.65,100.225
NetJ4_3 on Top Layer "NETJ4_3_L01_P024" (solid, remove dead copper, pour order 24): 58.65,91.775 58.65,91.225 ccw(c59.275,91.225) 59.275,90.6 cw(c59.275,90.55) 59.325,90.55 59.325,89.6 58.525,89.6 cw(c58.525,90.875) 57.25,90.875 57.25,91.775 cw(c57.425,91.775) 57.425,91.95 58.475,91.95 cw(c58.475,91.775)
NetJ2_4 on Top Layer "NETJ2_4_L01_P020" (solid, remove dead copper, pour order 20): 52.75,75.025 ccw(c52.575,75.025) 52.575,75.2 51.525,75.2 ccw(c51.525,75.025) 51.35,75.025 51.35,74.09 ccw(c53.695,73.895) 53.5,71.55 54.2,71.55 ccw(c54.2,71.825) 54.475,71.825 54.475,72.543 cw(c54.475,74.268) 52.75,74.268 52.75,75
NetJ2_1 on Top Layer "NETJ2_1_L01_P012" (solid, remove dead copper, pour order 12): 52.75,83.475 52.75,84.625 cw(c53.9,84.625) 53.9,85.775 53.9,86.775 52.975,86.775 ccw(c53.187,84.938) 51.35,84.725 51.35,83.475 ccw(c51.525,83.475) 51.525,83.3 52.575,83.3 ccw(c52.575,83.475)
NetJ2_3 on Top Layer "NETJ2_3_L01_P010" (solid, remove dead copper, pour order 10): 57.25,75.025 57.25,74.868 ccw(c59.118,74.868) 59.118,73 59.275,73 ccw(c59.275,73.525) 59.8,73.525 59.8,73.975 59.675,74 cw(c59.675,75.025) 58.65,75.025 ccw(c58.475,75.025) 58.475,75.2 57.425,75.2 ccw(c57.425,75.025)
NetJ2_2 on Top Layer "NETJ2_2_L01_P008" (solid, remove dead copper, pour order 8): 58.65,83.85 cw(c59.25,83.85) 59.25,84.45 59.25,85.45 57.927,85.45 ccw(c57.864,84.836) 57.25,84.9 57.25,83.475 ccw(c57.425,83.475) 57.425,83.3 58.5,83.3 ccw(c58.5,83.45) 58.65,83.45
GND on Bottom Layer "GND_L02_P000" (solid, remove dead copper, pour order 0): 80.5,41.6 80.4,105.65 24.107,105.694 24.107,41.6

## Other copper
Top Layer:
  pour cut-out: 80.725,102.45
  pour cut-out: 80.742,102.442
  pour cut-out: 80.425,102.45
Bottom Layer:
  pour cut-out: 27.3,105.7 27.3,106 23.95,106 23.95,102.3 24.1,102.3 24.1,102.675 cw(c27.125,102.675) 27.125,105.7
  pour cut-out: 24.1,44.85 23.8,44.85 23.8,41.5 27.5,41.5 27.5,41.65 27.125,41.65 cw(c27.125,44.675) 24.1,44.675
  pour cut-out: 77.2,41.65 77.2,41.35 80.55,41.35 80.55,45.05 80.4,45.05 80.4,44.675 cw(c77.375,44.675) 77.375,41.65
  pour cut-out: 80.2,102.35 80.5,102.35 80.5,105.7 76.8,105.7 76.8,105.55 77.175,105.55 cw(c77.175,102.525) 80.2,102.525

## Silkscreen, mask and mechanical layers (free items; w line width, h text height)
Top Overlay:
  lines w0.2: 51.5,44.1 51.5,43 59,43 ; 66.5,43.019 74.3,43.019 74.3,44
  text "SPI" at 44.225,100.375 h0.7 r90
  text "ToF10" at 44,96.168 h0.7 r90
  text "Motor R" at 75.5,92.7 h1 r90
  text "ToF9" at 44,91.9 h0.7 r90
  text "ToF8" at 44,87.6 h0.7 r90
  text "ToF7" at 44,83.036 h0.7 r90
  text "ToF6" at 44,78.5 h0.7 r90
  text "RysBoard v4.1" at 79,78.5 h1.5 r90
  text "Motor L" at 75.7,76.2 h1 r90
  text "ToF5" at 44,74.1 h0.7 r90
  text "ToF4" at 44.1,69.7 h0.7 r90
  text "ToF3" at 44,65.3 h0.7 r90
  text "ToF2" at 44.1,60.5 h0.7 r90
  text "ToF1" at 44.125,55.9 h0.7 r90
  text "IMU" at 41.8,51.6 h0.7 r90
  text "TMP" at 42,46.9 h0.7 r90
  text "GND" at 34.3,43.8 h0.7 r90
  text "IO" at 35.6,43.8 h0.7 r90
  text "SCL" at 36.8,43.8 h0.7 r90
  text "SDA" at 38.1,43.8 h0.7 r90
  text "VCC" at 39.4,43.8 h0.7 r90
  text "Battery" at 59.55,43.075 h1
  text "SW" at 46.125,42.975 h1
Mechanical 2:
  lines w0.3: 80.2,41.8 24.257,41.8 24.257,105.5 80.257,105.5 80.257,41.8
Mechanical 11:
  lines w2: 23.1,44.7 ccw(c27.1,44.7) 27.1,40.7 ; 23.1,102.625 cw(c27.1,102.625) 27.1,106.625 ; 77.4,40.7 ccw(c77.4,44.7) 81.4,44.7 ; 77.4,106.65 cw(c77.4,102.65) 81.4,102.65
Mechanical 15:
  lines w2: 23.1,102.7 cw(c27.1,102.7) 27.1,106.7